# Altium PCB DISPLAY_BOARD.PcbDoc
Units mm, origin at the board's own origin, x right, y up, seen from the top; angles counter-clockwise.
Board outline 97 x 42 mm, 2 copper layers (Top Layer, Bottom Layer), stack 1.07 mm thick; 2 components, 11 nets, 12 pads, 0 vias.
Unrouted connection lines stored in the file: 1.
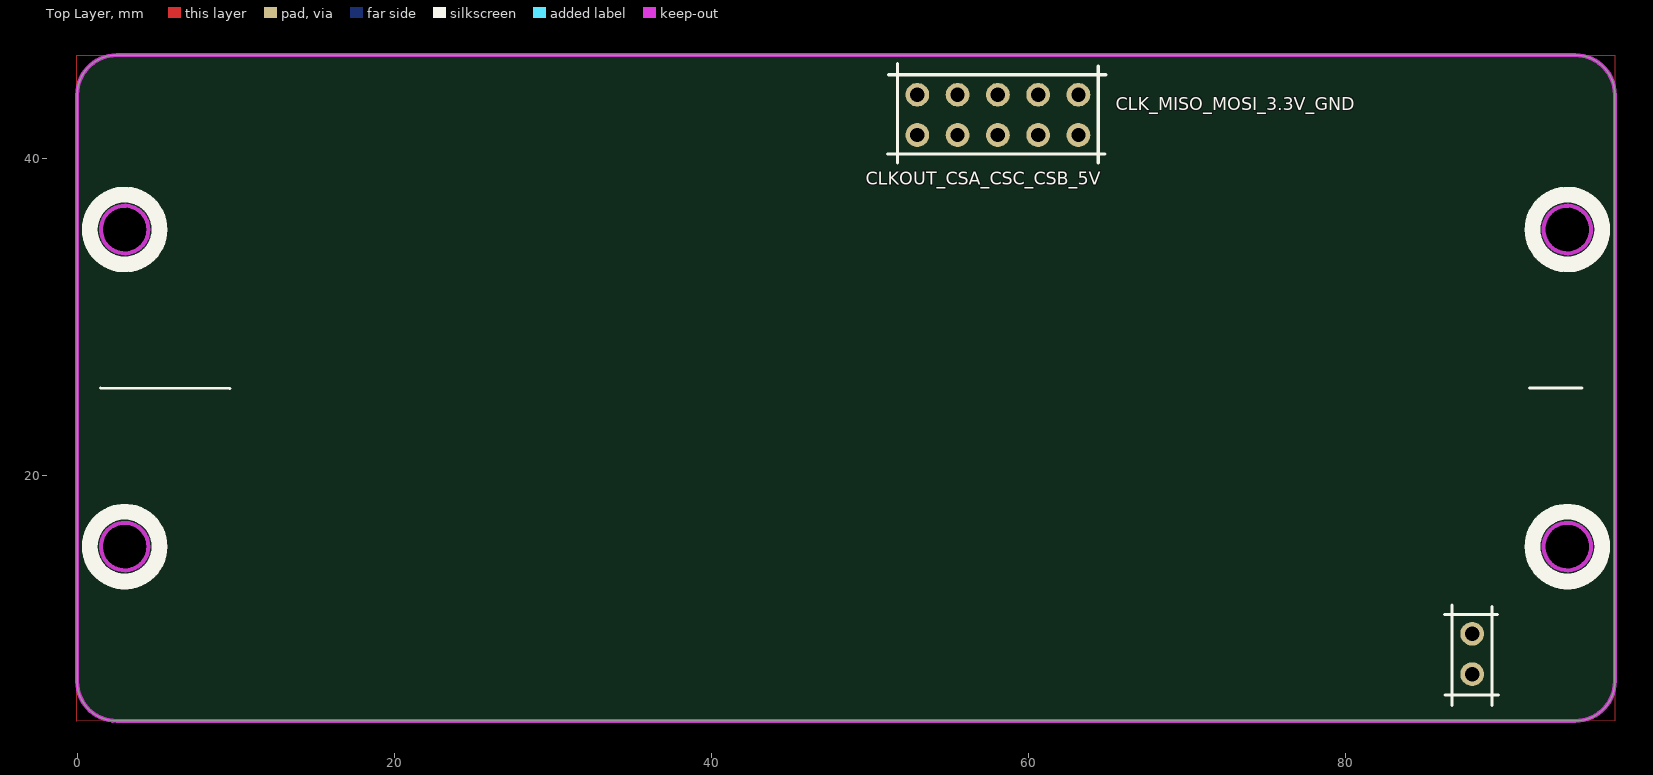
[diagram p0: Top Layer view]
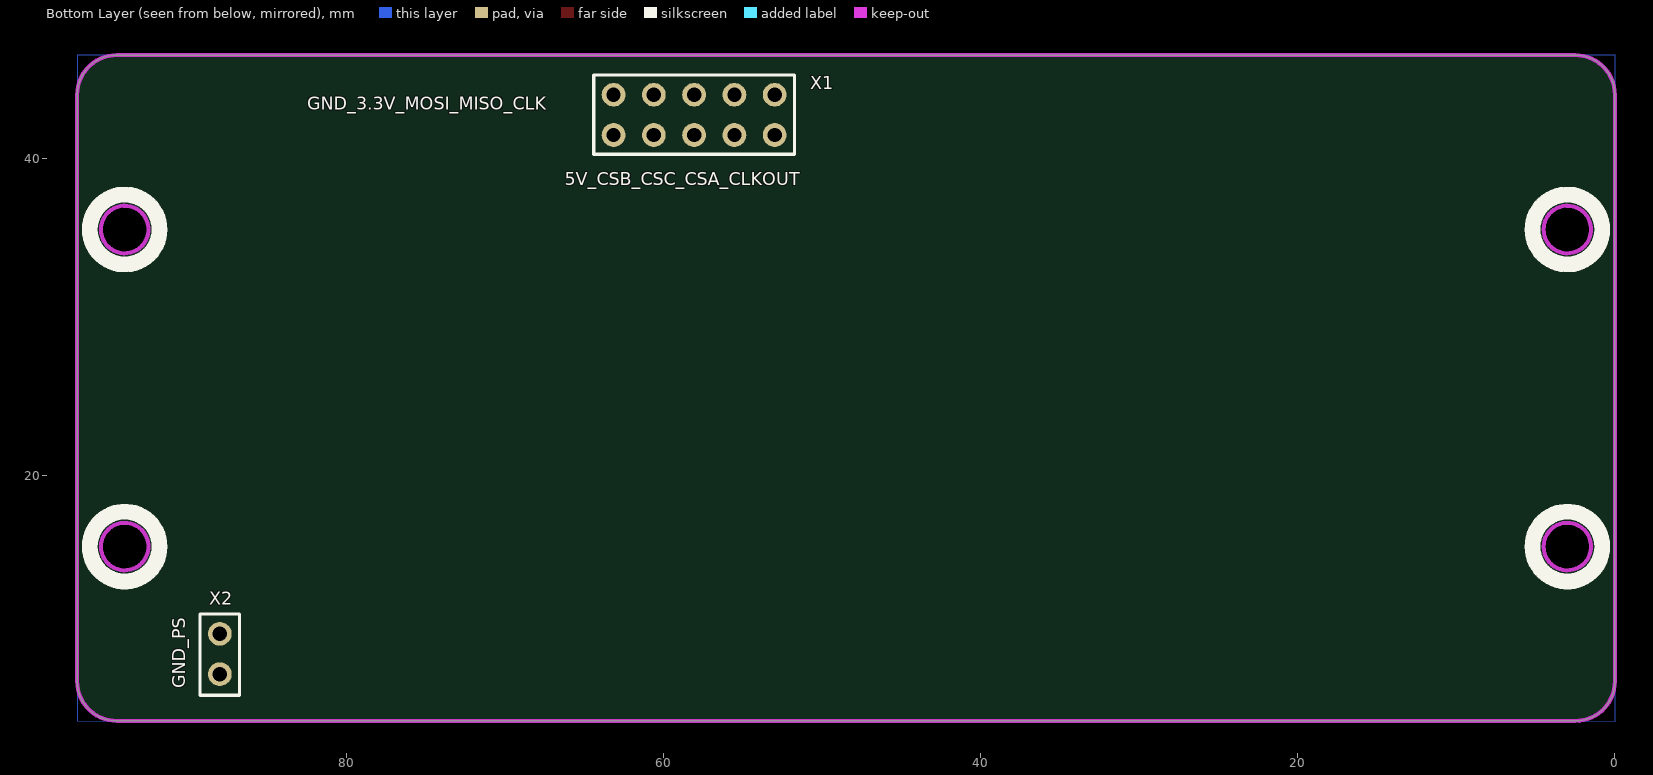
[diagram p1: Bottom Layer view, seen from below]

## Layer stack, top to bottom
Top Solder: solder mask 0.0102, Solder Resist, Dk 3.5
Top Layer: signal copper 0.035
Dielectric 1: dielectric 1, FR-4, Dk 4.8
Bottom Layer: signal copper 0.035
Bottom Solder: solder mask 0.0102, Solder Resist, Dk 3.5

## Board outline
0,7 0,44 cw(c2.5,44) 2.5,46.5 94.5,46.5 cw(c94.5,44) 97,44 97,7.004 cw(c94.5,7.004) 94.5,4.504 94.5,4.5 2.5,4.5 cw(c2.5,7)
cut-out: 92.5,15.5 ccw(c94,15.5) 94,14 ccw(c94,15.5) 95.5,15.5 ccw(c94,15.5) 94,17 ccw(c94,15.5)
cut-out: 92.5,35.5 ccw(c94,35.5) 94,34 ccw(c94,35.5) 95.5,35.5 ccw(c94,35.5) 94,37 ccw(c94,35.5)
cut-out: 1.5,15.5 ccw(c3,15.5) 3,14 ccw(c3,15.5) 4.5,15.5 ccw(c3,15.5) 3,17 ccw(c3,15.5)
cut-out: 1.5,35.5 ccw(c3,35.5) 3,34 ccw(c3,35.5) 4.5,35.5 ccw(c3,35.5) 3,37 ccw(c3,35.5)

## Design rules (kind name [scope] priority, off if disabled: settings)
Clearance [All] p1: gap=0.2 ignorepadtopadclearanceinfootprint=FALSE
ComponentClearance [All] p1: gap=0.254 collisioncheckmode=3 verticalgap=-1000 showdistances=FALSE
DiffPairsRouting [All] p1: maxlimit=0.254 minlimit=0.254 mostfreqgap=0.254 substack1={4B50B899-47C3-418E-9050-B6DC38691620} toplayer_{4b50b899-47c3-418e-9050-b6dc38691620}_minwidth=0.381 toplayer_{4b50b899-47c3-418e-9050-b6dc38691620}_maxwidth=0.381 toplayer_{4b50b899-47c3-418e-9050-b6dc38691620}_prefwidth=0.381 bottomlayer_{4b50b899-47c3-418e-9050-b6dc38691620}_minwidth=0.381 bottomlayer_{4b50b899-47c3-418e-9050-b6dc38691620}_maxwidth=0.381 bottomlayer_{4b50b899-47c3-418e-9050-b6dc38691620}_prefwidth=0.381 substack2={0B3DB408-A969-412D-8C07-BA8AE97219D9} toplayer_{0b3db408-a969-412d-8c07-ba8ae97219d9}_minwidth=0.381 toplayer_{0b3db408-a969-412d-8c07-ba8ae97219d9}_maxwidth=0.381 toplayer_{0b3db408-a969-412d-8c07-ba8ae97219d9}_prefwidth=0.381 bottomlayer_{0b3db408-a969-412d-8c07-ba8ae97219d9}_minwidth=0.381 bottomlayer_{0b3db408-a969-412d-8c07-ba8ae97219d9}_maxwidth=0.381 bottomlayer_{0b3db408-a969-412d-8c07-ba8ae97219d9}_prefwidth=0.381 substack3={378827E6-B38F-4565-9D2F-710D8D441C30} toplayer_{378827e6-b38f-4565-9d2f-710d8d441c30}_minwidth=0.381 toplayer_{378827e6-b38f-4565-9d2f-710d8d441c30}_maxwidth=0.381 toplayer_{378827e6-b38f-4565-9d2f-710d8d441c30}_prefwidth=0.381 bottomlayer_{378827e6-b38f-4565-9d2f-710d8d441c30}_minwidth=0.381 bottomlayer_{378827e6-b38f-4565-9d2f-710d8d441c30}_maxwidth=0.381 bottomlayer_{378827e6-b38f-4565-9d2f-710d8d441c30}_prefwidth=0.381 substack4={A23D90DD-733B-49C5-8102-56B3D284E3A0} toplayer_{a23d90dd-733b-49c5-8102-56b3d284e3a0}_minwidth=0.381 toplayer_{a23d90dd-733b-49c5-8102-56b3d284e3a0}_maxwidth=0.381 toplayer_{a23d90dd-733b-49c5-8102-56b3d284e3a0}_prefwidth=0.381 bottomlayer_{a23d90dd-733b-49c5-8102-56b3d284e3a0}_minwidth=0.381 bottomlayer_{a23d90dd-733b-49c5-8102-56b3d284e3a0}_maxwidth=0.381 bottomlayer_{a23d90dd-733b-49c5-8102-56b3d284e3a0}_prefwidth=0.381 toplayer_minwidth=0.381 toplayer_maxwidth=0.381 toplayer_prefwidth=0.381 bottomlayer_minwidth=0.381 bottomlayer_maxwidth=0.381 bottomlayer_prefwidth=0.381 substack5={2AFA0E03-A734-4C26-A0DC-ACBC6FAC5E6E} toplayer_{2afa0e03-a734-4c26-a0dc-acbc6fac5e6e}_minwidth=0.381 toplayer_{2afa0e03-a734-4c26-a0dc-acbc6fac5e6e}_maxwidth=0.381 toplayer_{2afa0e03-a734-4c26-a0dc-acbc6fac5e6e}_prefwidth=0.381 bottomlayer_{2afa0e03-a734-4c26-a0dc-acbc6fac5e6e}_minwidth=0.381 bottomlayer_{2afa0e03-a734-4c26-a0dc-acbc6fac5e6e}_maxwidth=0.381 bottomlayer_{2afa0e03-a734-4c26-a0dc-acbc6fac5e6e}_prefwidth=0.381 substack6={1E65D4A7-266F-4925-B814-5E9C4A66F8EE} toplayer_{1e65d4a7-266f-4925-b814-5e9c4a66f8ee}_minwidth=0.381 toplayer_{1e65d4a7-266f-4925-b814-5e9c4a66f8ee}_maxwidth=0.381 toplayer_{1e65d4a7-266f-4925-b814-5e9c4a66f8ee}_prefwidth=0.381 bottomlayer_{1e65d4a7-266f-4925-b814-5e9c4a66f8ee}_minwidth=0.381 bottomlayer_{1e65d4a7-266f-4925-b814-5e9c4a66f8ee}_maxwidth=0.381 bottomlayer_{1e65d4a7-266f-4925-b814-5e9c4a66f8ee}_prefwidth=0.381 substack7={93C5D03E-862D-45F8-9871-970EEA9B3F11} toplayer_{93c5d03e-862d-45f8-9871-970eea9b3f11}_minwidth=0.381 toplayer_{93c5d03e-862d-45f8-9871-970eea9b3f11}_maxwidth=0.381 toplayer_{93c5d03e-862d-45f8-9871-970eea9b3f11}_prefwidth=0.381 bottomlayer_{93c5d03e-862d-45f8-9871-970eea9b3f11}_minwidth=0.381 bottomlayer_{93c5d03e-862d-45f8-9871-970eea9b3f11}_maxwidth=0.381 bottomlayer_{93c5d03e-862d-45f8-9871-970eea9b3f11}_prefwidth=0.381 maxuncoupledlength=12.7
Height [All] p1: minheight=-1000 maxheight=100 prefheight=12.7
HoleSize [All] p1: absolutevalues=TRUE maxlimit=6 minlimit=0.01 maxpercent=80.000 minpercent=20.000
HoleToHoleClearance [All] p1: gap=0.1 allowstackedmicrovias=TRUE
MinimumSolderMaskSliver [All] p1: minsoldermaskwidth=0.1
PlaneConnect [All] p1: pad.planeconnectstyle=Relief pad.reliefexpansion=0.5 pad.reliefentries=4 pad.reliefconductorwidth=0.5 pad.reliefairgap=0.15 via.planeconnectstyle=Direct via.reliefexpansion=0.5 via.reliefentries=4 via.reliefconductorwidth=0.5 via.reliefairgap=0.15
PolygonConnect VQFN20 [HasFootprint('VQFN20')] p1: connectstyle=Direct reliefconductorwidth=0.254 reliefentries=4 polygonreliefangle="90 Angle" airgapwidth=0.254
PolygonConnect [All] p2: thpad.connectstyle=Relief thpad.reliefconductorwidth=0.3 thpad.reliefentries=4 thpad.polygonreliefangle="90 Angle" thpad.airgapwidth=0.15 smdpad.connectstyle=Relief smdpad.reliefconductorwidth=0.3 smdpad.reliefentries=4 smdpad.polygonreliefangle="90 Angle" smdpad.airgapwidth=0.15 via.connectstyle=Direct via.reliefconductorwidth=0.3 via.reliefentries=4 via.polygonreliefangle="90 Angle" via.airgapwidth=0.15
RoutingVias [All] p1: holewidth=0.1 width=0.1 viastyle="Through Hole" minholewidth=0 minwidth=0.3 maxholewidth=2 maxwidth=4
ShortCircuit [All] p1: allowed=TRUE
SilkToSolderMaskClearance [IsPad] p1: minsilkscreentomaskgap=0.1 clearancetoexposedcopper=TRUE
SolderMaskExpansion SolderMaskExpansion_Via [IsVia] p1: expansion=0.102 istentingtop=TRUE
SolderMaskExpansion [All] p2: expansion=0.01 istentingtop=FALSE
UnRoutedNet [All] p1: checkbadconnections=TRUE
Width [All] p1: maxlimit=5 minlimit=0.2 preferedwidth=0.3 substack1={4B50B899-47C3-418E-9050-B6DC38691620} substack2={0B3DB408-A969-412D-8C07-BA8AE97219D9} substack3={378827E6-B38F-4565-9D2F-710D8D441C30} substack4={A23D90DD-733B-49C5-8102-56B3D284E3A0} substack5={2AFA0E03-A734-4C26-A0DC-ACBC6FAC5E6E} substack6={1E65D4A7-266F-4925-B814-5E9C4A66F8EE} substack7={93C5D03E-862D-45F8-9871-970EEA9B3F11}
20 further rules are at their usual default settings.

## Components (designator, comment, footprint, x,y, rotation, side; value= is the part's Value field where it differs from the comment)
X1 "BH-10" PBD-10 63.16,44 r180 bottom locked
X2 "GND_PS" CONN-PLS-2 88,10 r270 bottom locked

## Footprints (in the part's own frame and the unit in brackets; to place one, negate y for a bottom-side part, rotate by r counter-clockwise, add the part's x,y. Pads: shape width x height; smd on the part's side, far side on the other; paste and mask are expansions set on the pad)
CONN-PLS-2 [mm]
  round 1.5 hole 0.9: 1(0,0) 2(2.55,0)
  silkscreen extent -1.25,-1.25 3.88,1.25, body extent -1.27,-1.27 3.81,1.27, height 8.54
PBD-10 [mm]
  round 1.5 hole 0.9: 1(0,0) 2(2.54,0) 3(5.08,0) 4(7.62,0) 5(10.16,0) 6(0,-2.54) 7(2.54,-2.54) 8(5.08,-2.54) 9(7.62,-2.54) 10(10.16,-2.54)
  silkscreen extent -1.25,-3.75 11.41,1.25, body extent -1.25,-3.81 11.45,1.27, height 8.4

## Part data
X2: library part CONN-2-PIN

## Nets (pads, with @x,y where several pads share a name; then routed paths per layer and width w, separated by ;. In a path a pad name is that pad's centre, name@x,y a point inside that pad or via, vN(x,y) a via of type N, cw(c..) or ccw(c..) an arc to the next point about the centre after c; other vN are vias at no path point)
3.3V: X1.2
5V: X1.6
CLKOUT: X1.10
CS_A: X1.9
CS_B: X1.7
CS_C: X1.8
GND: X1.1 X2.2
MISO: X1.4
MOSI: X1.3
PS: X2.1
SCLK: X1.5

## Polygon pours and split planes (outlines as drawn)
no net on Top Layer "NONET_L-01_P-001" (solid, shelved, pour order 1): -0.025,4.496 -0.025,46.5 97,46.5 97,4.5
no net on Bottom Layer "NONET_L-01_P-001" (solid, shelved, pour order 0): -0.025,4.496 -0.025,46.5 97,46.5 97,4.5

## Keep-outs
Keep-Out Layer:
  circle w0.254: c3,35.5 r1.5
  circle w0.254: c3,15.5 r1.5
  circle w0.254: c94,15.5 r1.5
  circle w0.254: c94,35.5 r1.5
  lines w0.254: 2.5,4.5 cw(c2.5,7) 0,7 0,44 cw(c2.5,44) 2.5,46.5 94.5,46.5 cw(c94.5,44) 97,44 97,7.004 cw(c94.5,7.004) 94.5,4.504 ; 2.515,4.5 94.5,4.5

## Silkscreen, mask and mechanical layers (free items; w line width, h text height)
Top Overlay:
  circle w1: c94,35.5 r2.2
  circle w1: c94,15.5 r2.2
  circle w1: c3,35.5 r2.2
  circle w1: c3,15.5 r2.2
  lines w0.2: 1.47,25.5 9.627,25.478 ; 51.13,40.259 64.846,40.259 ; 51.181,45.263 64.897,45.263 ; 51.74,39.7 51.74,45.974 ; 64.41,39.7 64.41,45.796 ; 86.258,11.224 89.586,11.224 ; 86.284,6.128 89.662,6.128 ; 86.73,5.486 86.73,11.818 ; 89.255,5.486 89.255,11.709 ; 91.614,25.5 94.935,25.5
  text "CLK_MISO_MOSI_3.3V_GND" at 65.502,43.027 h0.8
  text "CLKOUT_CSA_CSC_CSB_5V" at 49.759,38.335 h0.8
Bottom Overlay:
  circle w1: c94,35.5 r2.2
  circle w1: c94,15.5 r2.2
  circle w1: c3,15.5 r2.2
  circle w1: c3,35.5 r2.2
  text "GND_3.3V_MOSI_MISO_CLK" at 82.474,43.059 h0.8
  text "5V_CSB_CSC_CSA_CLKOUT" at 66.243,38.284 h0.8